# EAGLE board Francesco (EAGLE 6.4)
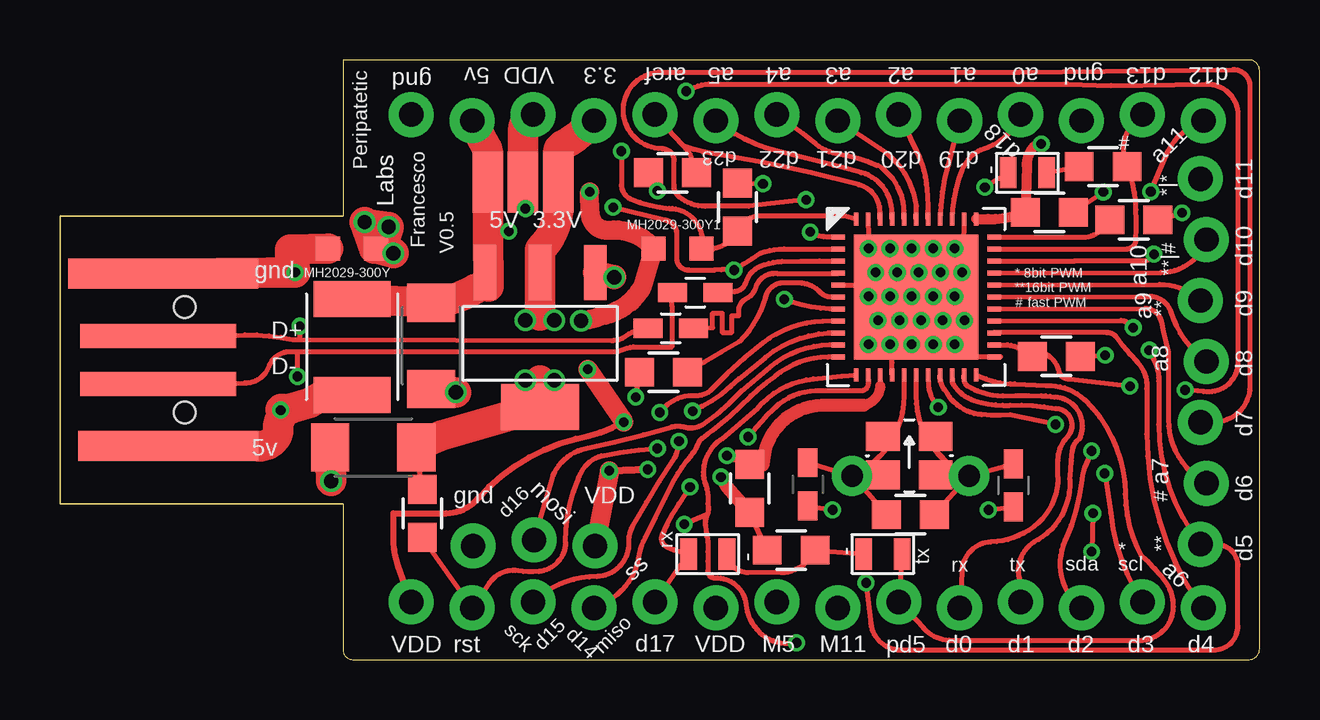
[diagram p0: board, top side]
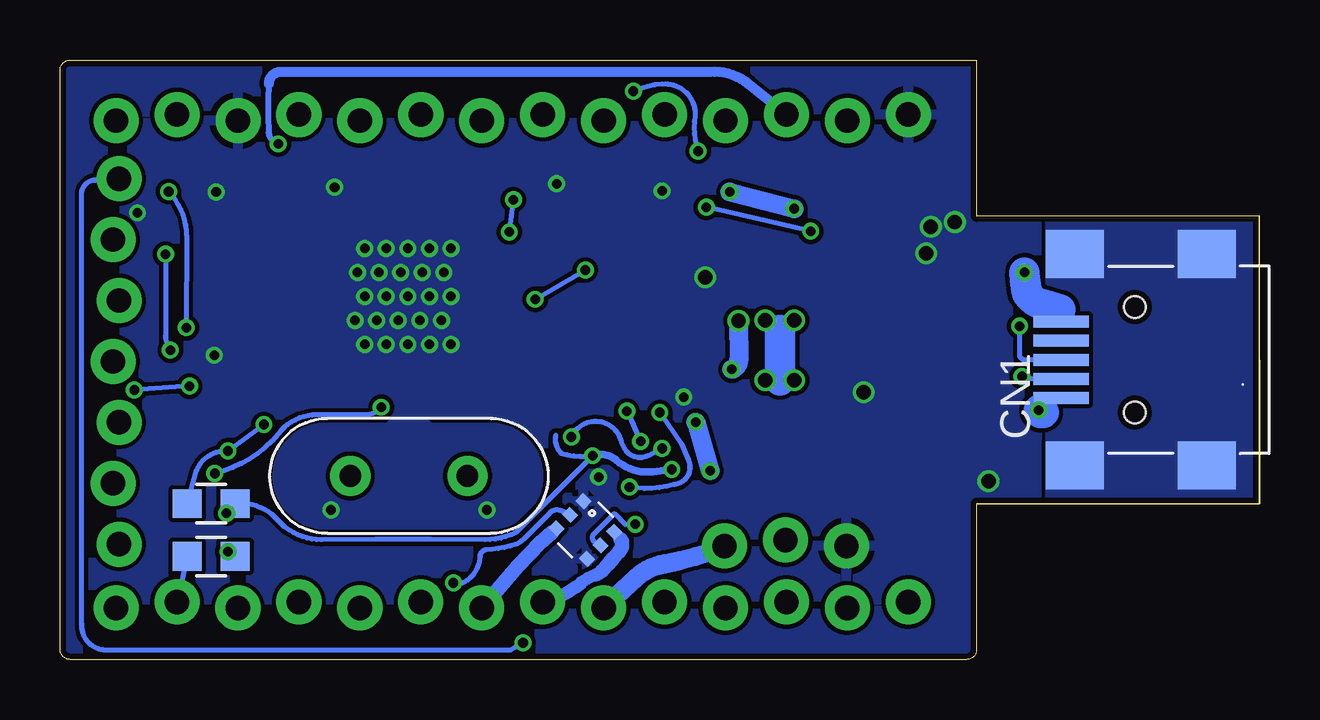
[diagram p1: board, bottom side, seen from below]

Size 50 x 25 mm. Coordinates in mm from the lower left corner, seen from the top.
Outline: 0,6.5 11.8,6.5 11.8,0.4 arc90 12.2,0 49.58,0 arc90 50,0.42 50,24.58 arc90 49.58,25 11.8,25 11.8,24.7 11.8,18.5 0,18.5 0,6.5
Copper layers (1*16): Top 0.035mm / dielectric 1.5mm / Bottom 0.035mm
Design rules "Fusion_eagle_rule_v1.1(mod)": minimum track width 7mil, minimum drill 12mil, track to track 7mil, track to pad 7mil, pad to pad 7mil, via to via 7mil, smd to smd 0mil, copper to edge 10mil, drill to drill 10mil, minimum pad ring 10mil, minimum via ring 6mil, stop-mask expansion 2mil, vias tented up to drill 100mil, thermal gap 10mil
bRestrict: 5 lines

## Footprints (pad centres in the part's own frame; a part is rotated, then mirrored left to right if it is on the bottom)
0603-CAP = smd 1.2 x 0.8: 1 -0.9,0; 2 0.9,0
0805 = smd 1.2 x 1.2: 1 -1,0; 2 1,0
1210 = smd 1.6 x 2: 1 -1.8,0; 2 1.8,0
USB-MINIB = smd 0.5 x 2.308: D+ 0,4.064; D- -0.8,4.064; GND 1.6,4.064; ID 0.8,4.064; VBUS -1.6,4.064 | smd 2 x 2.4: GND1 -4.4,-2; GND2 -4.4,3.5; GND3 4.4,3.5; GND4 4.4,-2 | hole 0.9: -2.2,1; 2.2,1
1X03_LOCK = drill 1.016 pad 1.88: 1 0,0.127; 2 2.54,-0.127; 3 5.08,0.127
1X07_LOCK = drill 1.016 pad 1.88: 1 0,0.127; 2 2.54,-0.127; 3 5.08,0.127; 4 7.62,-0.127; 5 10.16,0.127; 6 12.7,-0.127; 7 15.24,0.127
2029 = smd 1 x 1: P$1 -1,0; P$2 1,0
MF-MSMF = smd 1.5 x 3.2: P$1 -2,0; P$2 2,0
0603-RES = smd 1.2 x 0.8: 1 -0.95,0; 2 0.95,0
QFN-44 = smd 0.55 x 0.2: 1 -3.25,2.5; 2 -3.25,2; 3 -3.25,1.5; 4 -3.25,1; 5 -3.25,0.5; 6 -3.25,0; 7 -3.25,-0.5; 8 -3.25,-1; 9 -3.25,-1.5; 10 -3.25,-2; 11 -3.25,-2.5; 23 3.25,-2.5; 24 3.25,-2; 25 3.25,-1.5; 26 3.25,-1; 27 3.25,-0.5; 28 3.25,0; 29 3.25,0.5; 30 3.25,1; 31 3.25,1.5; 32 3.25,2; 33 3.25,2.5 | smd 0.2 x 0.55: 12 -2.5,-3.25; 13 -2,-3.25; 14 -1.5,-3.25; 15 -1,-3.25; 16 -0.5,-3.25; 17 0,-3.25; 18 0.5,-3.25; 19 1,-3.25; 20 1.5,-3.25; 21 2,-3.25; 22 2.5,-3.25; 34 2.5,3.25; 35 2,3.25; 36 1.5,3.25; 37 1,3.25; 38 0.5,3.25; 39 0,3.25; 40 -0.5,3.25; 41 -1,3.25; 42 -1.5,3.25; 43 -2,3.25; 44 -2.5,3.25 | smd 5.2 x 5.2: PAD 0,0
HC49US = drill 0.9 pad 1.676: 1 -2.44,0; 2 2.44,0
USB_PCB = smd 7.5 x 1.25: 5V -4.5,3.6 | smd 6.5 x 1: D+ -4.1,-1; D- -4.1,1 | smd 7.9 x 1.25: GND -4.3,-3.6
ZLDO1117 = smd 0.95 x 2.3: 1 -2.3,-3; 2 0,-3; 3 2.3,-3 | smd 3.25 x 1.9: 4 0,2.6
1X14_LOCK = drill 1.016 pad 1.88: 1 0,0.127; 2 2.54,-0.127; 3 5.08,0.127; 4 7.62,-0.127; 5 10.16,0.127; 6 12.7,-0.127; 7 15.24,0.127; 8 17.78,-0.127; 9 20.32,0.127; 10 22.86,-0.127; 11 25.4,0.127; 12 27.94,-0.127; 13 30.48,0.127; 14 33.02,-0.127
BRIDGE-3 = smd 1.27 x 2.54: 1 -1.47,0; 2 0,0; 3 1.47,0
XTAL3.2X2.5 = smd 1.4 x 1.2: 1 -1.1,-0.8; 2 1.1,-0.8; 3 1.1,0.8; 4 -1.1,0.8
0805-LED = smd 1.3 x 0.7: + 0,0.8; - 0,-0.8
SOT-363 = smd 0.5 x 0.45: 1 -0.9,0.8; 2 -0.9,0; 3 -0.9,-0.8; 4 0.9,-0.8; 5 0.9,0; 6 0.9,0.8

## Placement (x,y rotation side)
C1  18pF  [0603-CAP]  31.17,7.31 270 top
C2  18pF  [0603-CAP]  39.74,7.26 270 top
C3  0.1uF  [0805]  28.75,7.14 270 top
C5  1uF  [0805]  25.15,11.98 180 top
C6  10uF  [1210]  15.47,13.08 270 top
C7  10uF  [1210]  13.06,8.84 180 top
C9  0.1uF  [0805]  41.24,18.65 180 top
C10  0.1uF  [0805]  25.53,20.3 0 top
C11  0.1uF  [0805]  28.24,18.86 90 top
C12  0.1uF  [0805]  41.53,12.64 180 top
CN1  [USB-MINIB]  4.2,12.5 90 bottom
JP1  [1X03_LOCK]  22.3,4.86 180 top
JP4  [1X07_LOCK]  47.66,20.05 270 bottom
MH2029-300Y  FERRITE-2029  [2029]  12.17,17.14 180 top
MH2029-300Y1  FERRITE-2029  [2029]  25.74,17.14 180 top
PTH-FUSE  FUSE-PTH_MF-MSMF050  [MF-MSMF]  12.18,13.04 270 top
R1  1M  [0805]  35.45,6.04 0 top
R2  22  [0603-RES]  26.48,15.3 0 top
R3  22  [0603-RES]  25.46,13.81 0 top
R4  10k  [0805]  44.76,18.33 0 top
R5  1k  [0805]  43.48,20.55 180 top
R6  10k  [0805]  15.1,6.1 90 top
R7  1k  [0805]  30.48,4.56 180 top
R8  3.3k  [0805]  43.7,6.5 180 bottom
R9  3.3k  [0805]  43.7,4.3 0 bottom
U$1  ATMEGA32U4  [QFN-44]  35.68,15.12 0 top
U$2  HC49US  [HC49US]  35.45,7.66 180 bottom
U$3  USB-PCB  [USB_PCB]  0,12.5 180 top
U$4  5V-LDO-ZLDO1117  [ZLDO1117]  20.01,13.13 180 top
U$5  M14  [1X14_LOCK]  14.64,2.28 0 top
U$6  M14  [1X14_LOCK]  47.66,22.6 180 top
U$7  BRIDGE-3  [BRIDGE-3]  19.3,19.9 180 top
U$8  CRYSTAL-3.2X2.5  [XTAL3.2X2.5]  35.4,8.5 0 top
U$9  LED0805  [0805-LED]  40.32,20.3 270 top
U$10  LED0805  [0805-LED]  34.3,4.4 270 top
U$11  LED0805  [0805-LED]  27,4.4 90 top
U$12  N-DUAL-MOSFET  [SOT-363]  28.1,5.4 315 bottom

## Library data of the parts
C1-C3 C5-C7 C9-C12 JP1 JP4 MH2029-300Y MH2029-300Y1 PTH-FUSE R1-R9 U$1-U$12 = 1dah
CN1 = adafruit

## Nets
3V3: C7.1 R6.2 U$4.2 U$4.4 U$6.11 U$7.1
A0: U$1.36 U$6.4
A1: U$1.37 U$6.5
A2: U$1.38 U$6.6
A3: U$1.39 U$6.7
A4: U$1.40 U$6.8
A5: U$1.41 U$6.9
AREF: C10.2 U$1.42 U$6.10
AVDD: C11.1 C12.2 MH2029-300Y1.P$1 U$1.24 U$1.44
D0: U$1.20 U$5.10
D1: U$1.21 U$5.11
D2: R8.2 U$1.19 U$5.12
D3: R9.1 U$1.18 U$5.13
D4: U$1.25 U$5.14
D5: JP4.7 U$1.31 U$12.2
D6: JP4.6 U$1.27
D7: JP4.5 U$1.1
D8: JP4.4 U$1.28
D9: JP4.3 U$1.29
D10: JP4.2 U$1.30
D11: JP4.1 U$1.12 U$12.5
D12: U$1.26 U$6.1
D13: R5.1 U$1.32 U$6.2
D+: R3.2 U$1.4
D+IN: CN1.D+ R3.1 U$3.D+
D-: R2.2 U$1.3
D-IN: CN1.D- R2.1 U$3.D-
GND: C1.2 C2.2 C3.2 C5.2 C6.2 C7.2 C9.1 C10.1 C11.2 C12.1 JP1.3 MH2029-300Y.P$1 R4.2 R7.2 U$1.5 U$1.15 U$1.23 U$1.35 U$1.43 U$1.PAD U$4.1 U$6.3 U$6.14 U$9.- U$12.1 U$12.4
HWB: R4.1 U$1.33
M5: U$5.7 U$12.6
M11: U$5.8 U$12.3
MISO: U$1.11 U$5.4
MOSI: JP1.2 U$1.10
N$1: C1.1 R1.1 U$1.16 U$2.1 U$8.1
N$2: C2.1 R1.2 U$1.17 U$2.2 U$8.3
N$3: R7.1 U$10.- U$11.-
N$4: R5.2 U$9.+
RESET: R6.1 U$1.13 U$5.2
RXLED: U$1.8 U$5.5 U$11.+
SCK: U$1.9 U$5.3
TXLED: U$1.22 U$5.9 U$10.+
UCAP: C5.1 U$1.6
USB5V: C6.1 PTH-FUSE.P$1 U$1.2 U$1.7 U$4.3 U$6.13 U$7.3
USBGND: CN1.GND MH2029-300Y.P$2 U$3.GND
USBSHROUD: CN1.GND1 CN1.GND2 CN1.GND3 CN1.GND4
USBVIN: CN1.VBUS PTH-FUSE.P$2 U$3.5V
VDD: C3.1 C9.2 JP1.1 MH2029-300Y1.P$2 R8.1 R9.2 U$1.14 U$1.34 U$5.1 U$5.6 U$6.12 U$7.2

## Tracks (layer width: path | path; a pad name or v marks a point on that pad's centre or on a via)
3V3  (via drill 0.6)
  Top 0.2: R6.2 C7.1
  Top 0.813: v19.4,14.14 20,14.34 v20.6,14.14 | v19.4,11.64 20,11.64 v20.6,11.64
  Top 1.27: 20,11.64 20,11.03 U$4.4 15.9,9.34 arc9 C7.1 | 20,14.34 20,15.73 U$4.2 20,17.09 arc46 20.77,18.91 U$7.1 20.77,21.14 arc-63 20.96,21.45 arc22 U$6.11
  Bottom 0.813: v19.4,11.64 20,11.64 v20.6,11.64 | v19.4,14.14 20,13.74 v20.6,14.14
  Bottom 1.27: 20,13.74 20,11.64
A0
  Top 0.2: U$6.4 arc-53 38.5,21.3 arc49 37.6,20.4 arc22 U$1.36
A1
  Top 0.2: U$6.5 37,20.6 arc14 U$1.37
A2
  Top 0.2: 36.18,18.73 U$1.38 arc8 36.11,19.82 arc19 35.7,21.2 U$6.6
A3
  Top 0.2: U$1.39 35.69,18.87 arc50 34.2,21.3 U$6.7
A4
  Top 0.2: U$6.8 arc-5 31.5,21.5 arc30 32.4,21.1 arc-15 34.1,20.6 arc-58 35.18,18.7 U$1.40
A5
  Top 0.2: U$1.41 34.68,18.65 arc74 33.4,20.3 arc2 29.9,21.2 arc-26 U$6.9
AREF
  Top 0.2: C10.2 26.4,20.64 arc40 26,21.4 | 26,21.4 arc-1 U$6.10 | U$1.42 34.18,18.67 arc74 33.3,19.8 arc6 27.2,21.1 arc-10 26,21.4
AVDD  (via drill 0.4)
  Top 0.2: U$1.44 32.7,18.5 29.13,18.49 arc63 C11.1 arc-73 MH2029-300Y1.P$1 arc103 25.4,18.81 arc-18 23.8,19.2 arc-67 23.4,19.8 v23.4,21.2 | C12.2 arc37 39.5,13.12 U$1.24 39.48,13.12 40.6,12.9 arc-74 41.64,12 arc80 42.1,11.7 v44.6,11.4 | v46.9,11.24 arc-7 47.67,11.17 arc99 49.1,12.4 49.1,22.7 arc90 47.8,24 43.81,23.93 42,24 27.2,24 arc28 26.3,23.8 v26.1,23.7
  Bottom 0.2: v23.4,21.2 arc28 23.53,22.68 arc-98 24.9,24 arc-17 v26.1,23.7 | v44.6,11.4 v46.9,11.24
D0
  Top 0.2: U$1.20 37.19,11.64 arc42 37.24,11.47 arc40 38.1,10.8 arc21 39.6,10.6 arc-14 41.49,10.46 arc-135 42,9.3 arc44 41.6,8.3 41.6,7.6 arc-57 40.4,5.4 arc-31 38.8,4.9 arc86 37.6,3.7 arc-3 U$5.10
D1
  Top 0.2: U$1.21 arc0 37.68,11.7 arc63 37.86,11.39 arc6 38.26,11.2 arc23 39.3,11 arc-2 40.9,11 arc-11 41.46,10.94 arc-108 42.54,9.29 arc-30 42.46,9.18 arc45 42.2,8.7 arc2 42.1,7.5 arc-46 41.3,5.4 arc-14 40.6,4.9 arc93 40.2,2.9 arc-25 U$5.11
D2  (via drill 0.4)
  Top 0.2: v41.5,9.8 39.6,10.2 arc-9 38.42,10.21 arc-55 36.99,11.08 arc5 36.83,11.31 arc-38 U$1.19 36.69,11.58 | v43,8.7 42.7,8 arc9 42.6,7.5 arc-18 41.9,5 arc76 U$5.12
  Bottom 0.2: v41.5,9.8 v43,8.7 arc-71 44.3,7.9 R8.2
D3  (via drill 0.4)
  Top 0.2: U$1.18 36.2,11.4 arc34 v36.61,10.52 | v43.55,7.76 43.8,6.1 arc28 U$5.13
  Bottom 0.2: v36.61,10.52 arc56 37.4,10.2 39.3,10.2 arc-53 40.9,9.4 arc37 v43.55,7.76 | R9.1 U$5.13
D4
  Top 0.2: U$1.25 43.62,13.63 arc-60 44.03,13.44 arc9 44.9,12.4 arc-49 45.3,11.3 45.3,9.4 arc25 46.5,4 arc14 U$5.14
D5  (via drill 0.4)
  Top 0.2: U$1.31 42.3,16.62 45.12,16.62 arc61 v45.6,16.9 | v45.4,12.9 45.6,12.5 arc-28 45.8,11.6 45.8,9.8 arc38 JP4.7 arc2 48.2,4.8 arc-90 49.1,3.9 49.1,1.4 arc-90 48.1,0.4 35,0.4 arc-82 33.8,1.5 v33.6,3.2
  Bottom 0.2: v45.6,16.9 45.6,13.5 arc-37 v45.4,12.9 | U$12.2 29.1,6.2 arc-77 29.6,6.1 30.7,5 arc25 31,4.81 arc18 32.22,4.58 arc-87 32.5,4.3 arc62 33.2,3.2 arc53 v33.6,3.2
D6
  Top 0.2: U$1.27 45.23,14.64 arc-78 45.9,14.1 arc2 46.2,12.8 46.2,10 arc62 JP4.6
D7  (via drill 0.4)
  Top 0.2: JP4.5 arc-2 48.1,9.9 arc90 49.6,11.4 49.6,23.9 arc90 48.9,24.6 40,24.5 25.1,24.5 arc122 23.7,22.1 arc59 25.1,21.3 arc-90 25.6,20.8 25.6,19.8 arc56 25.8,19.3 arc40 26.9,18.9 28.7,18.9 v31.1,19.17 | U$1.1 31.94,17.62 arc-31 v31.27,17.83
  Bottom 0.2: v31.27,17.83 v31.1,19.17
D8
  Top 0.2: U$1.28 45.43,15.14 arc-73 46.3,14.5 arc37 JP4.4
D9
  Top 0.2: U$1.29 45.83,15.64 arc-43 JP4.3
D10
  Top 0.2: U$1.30 45.9,16.14 arc72 JP4.2
D11  (via drill 0.4)
  Top 0.2: U$1.12 arc0 31.4,11.7 arc44 29.1,10.5 27.6,9.2 arc31 27.1,8.7 arc50 26.87,7.4 arc-29 27.01,6.49 arc-21 27,6.1 | 27,6.1 arc35 26.9,5.6 arc4 27,4.9 arc-1 27,3.7 arc91 27.3,3.4 arc-86 28.6,2.3 arc97 v30.7,0.7 | 27,6.1 26.94,6.04 v26.02,5.64
  Bottom 0.2: JP4.1 arc8 48.5,20 arc-91 49.1,19.41 49.1,1.51 arc-94 48.1,0.4 31.2,0.4 arc7 v30.7,0.7 | U$12.5 27.7,4.9 arc110 27.73,5.25 26.89,6.09 26.43,5.62 v26.02,5.64
D12  (via drill 0.4)
  Top 0.2: U$1.26 44.23,14.14 arc-54 v44.73,13.84 | v45.47,19.51 46.1,21 arc-48 U$6.1
  Bottom 0.2: v44.73,13.84 44.71,17.67 arc-43 v45.47,19.51
D13
  Top 0.2: U$1.32 44.47,17.12 arc89 44.85,17.54 arc1 44.85,18.74 arc23 R5.1 arc-79 U$6.2
D+
  Top 0.2: R3.2 27.2,13.84 27.2,14.44 27.6,14.44 27.6,13.64 28,13.64 28,14.34 28.3,14.34 28.3,14.64 arc-53 28.6,15.04 arc45 29,15.5 arc-81 29.9,16.1 32.44,16.1 U$1.4
D+IN  (via drill 0.4)
  Top 0.2: U$3.D+ 7.7,13.54 arc-13 9.7,13.34 10,13.34 | 10,13.34 23,13.3 arc36 23.6,13.5 arc-31 R3.1 | v10,13.9 10,13.34
  Bottom 0.2: CN1.D+ 9.8,12.5 arc90 10,12.7 v10,13.9
D-
  Top 0.2: R2.2 28.1,15.34 arc70 28.6,15.74 arc-52 29.2,16.4 arc-20 30.1,16.6 arc-1 U$1.3
D-IN  (via drill 0.4)
  Top 0.2: U$3.D- 7.7,11.54 arc73 8.7,12.2 arc-75 9.7,12.84 9.9,12.84 | 9.9,12.84 23.1,12.84 arc23 23.4,12.9 arc-14 23.9,13.04 25.5,13.04 25.5,14.74 R2.1 | v9.9,11.8 9.9,12.84
  Bottom 0.2: CN1.D- 9.5,11.7 v9.9,11.8
GND  (via drill 0.4, 0.6)
  Top 0.2: v24,10.94 C5.2 | R4.2 v46.77,18.62 | U$1.43 33.7,17.64 arc74 U$1.PAD | U$1.5 33.29,15.62 arc-24 U$1.PAD | U$1.35 37.68,17.91 arc-70 U$1.PAD | U$1.PAD arc91 38.14,12.62 U$1.23 arc1 39.2,12.62 | U$1.15 34.68,12.38 arc-41 U$1.PAD | C11.2 v29.3,19.84 | C10.1 v24.9,19.54 | C12.1 v43.57,12.69 | U$1.PAD v34.9,16.14 | C9.1 v43.49,19.49 | v38.7,6.24 C2.2 | C1.2 v32.2,6.24 | U$9.- v38.55,19.69 | R7.2 C3.2
  Top 0.55: C3.2 27.8,7.2 v27.55,7.61
  Top 1.016: U$4.1 v23.1,15.94
  Top 1.27: MH2029-300Y.P$1 v13.9,16.94 13.4,17.14 v13.7,18.04 12.9,18.14 v12.7,18.24 13.1,17.14 | v16.5,11.14 15.57,11.14 C6.2 | C7.2 v11.3,7.44
  other vias: 33.7,17.14 37.3,13.14 34.6,17.14 35.5,17.14 36.4,17.14 37.3,17.14 34,16.14 35.8,16.14 36.7,16.14 37.6,16.14 33.7,15.14 34.6,15.14 35.5,15.14 36.4,15.14 37.3,15.14 36.4,13.14 35.5,13.14 34.6,13.14 33.7,13.14 34.1,14.14 35,14.14 35.9,14.14 36.8,14.14 37.7,14.14
  pour Bottom: -6.35,-5.08 101.6,-5.08 101.6,64.77 -6.35,64.77
HWB
  Top 0.2: U$1.33 42.75,17.61 arc55 R4.1
M5
  Bottom 0.2: U$12.6 26.63,5.02
  Bottom 0.5: 27.68,3.52 arc-23 28.27,3.2
  Bottom 0.55: 27.4,3.7 arc31 27.68,3.52 | 28.27,3.2 arc27 U$5.7
  Bottom 0.6: 26.63,5.02 arc82 26.7,4.5 arc1 27.4,3.7
M11
  Bottom 0.2: U$12.3 29.5,5.3
  Bottom 0.6: 29.5,5.3 arc-8 30.9,3.9 arc0 U$5.8
MISO
  Top 0.2: U$1.11 32.01,12.61 arc40 29.8,11.8 arc10 28.8,11 arc-9 27.45,9.76 arc0 26.76,9.22 arc32 26.6,9 arc-22 26.3,8.5 arc13 25.6,7.5 arc-1 24.4,5.1 arc19 24.1,4.2 arc-31 23.6,3.1 arc-29 U$5.4
MOSI
  Top 0.2: 32.09,13.12 U$1.10 arc44 29.6,12.2 28.4,11.2 arc-12 26.8,9.8 arc-47 26,9.7 arc32 25.5,9.7 arc-5 21.91,8.8 arc62 20.5,7.5 JP1.2
N$1
  Top 0.2: U$1.16 35.18,11 arc-65 U$2.1 | C1.1 U$2.1 | U$2.1 33.42,7.23 | 33.42,7.23 R1.1 | U$8.1 33.42,7.23
N$2
  Top 0.2: U$1.17 35.68,11 arc68 U$2.2 | U$2.2 C2.1 | R1.2 U$2.2 | U$8.3 36.5,8.7 37.1,8.1 U$2.2
N$3
  Top 0.2: U$10.- R7.1 arc-63 30.07,3.63 28.69,3.62 arc-82 U$11.-
N$4
  Top 0.2: U$9.+ R5.2
RESET  (via drill 0.4)
  Top 0.2: U$1.13 33.69,11.52 arc-86 33.4,11.2 31.5,11.2 arc41 29.8,10.5 arc8 v28.68,9.28 | R6.1 U$5.2 arc-2 17.9,3.2 arc-64 19.1,3.7 arc14 19.95,3.67 arc85 21.07,4.9 arc-24 21.6,7.5 arc-58 22.57,8.5 arc-7 v24.9,8.8
  Bottom 0.2: v24.9,8.8 25.5,8.5 arc78 26.4,8.7 arc24 26.6,9.1 arc-141 v28.68,9.28
RXLED  (via drill 0.4)
  Top 0.2: U$1.8 31.8,14.1 arc36 29.3,13.2 arc8 27.1,11.2 arc-31 26.6,11 arc-9 26.2,11 arc47 v25,10.3 | U$5.5 U$11.+ arc-10 25.3,4.7 arc-89 25.1,5.2 arc-11 25.8,6.5 v26.26,7.19
  Bottom 0.2: v25,10.3 24.1,9 23.8,8.3 arc108 24.4,7.3 arc25 v26.26,7.19
SCK  (via drill 0.4)
  Top 0.2: 32.07,13.62 U$1.9 arc41 29.4,12.6 28.3,11.7 arc-21 v26.37,10.36 | v25.8,9.1 arc-24 25.8,9 arc-23 25.53,8.28 arc4 23.93,5.68 arc33 23.7,4.9 arc-90 22.38,3.46 arc44 U$5.3
  Bottom 0.2: v26.37,10.36 v25.8,9.1
TXLED
  Top 0.2: U$1.22 38.6,11.7 arc25 39.8,11.5 41.11,11.42 arc-46 42.69,10.84 arc-46 44.4,6.9 arc30 45.1,4.3 arc-16 46.11,3.2 arc-41 46.4,2.06 arc-84 45,0.8 37.2,0.8 arc-48 36,1.3 U$5.9 U$10.+
UCAP
  Top 0.2: U$1.6 32.11,15.12 arc-47 31.7,15.3 arc50 30.7,15.7 30.1,15.7 arc74 29.4,15.1 arc-30 28.3,13.24 arc1 C5.1
USB5V  (via drill 0.4)
  Top 0.2: 17.3,15.44 arc17 U$4.3 | U$4.3 17.7,16.84 arc-91 v18.71,17.86 | v23.06,18.86 25.2,18.34 arc-90 25.7,17.64 25.7,16.74 arc90 26.2,16.24 27.3,16.24 arc-8 v28.1,16.24 arc2 29.2,16.94 arc-20 30.18,17.12 32.41,17.12 U$1.2 | U$1.7 32.09,14.62 arc-19 v30.19,15.02 | 17.87,15.55 U$4.3
  Top 1.27: PTH-FUSE.P$1 C6.1 | C6.1 arc28 17.3,15.44 | C6.1 15,14.94 | U$6.13 17.8,21.3 17.85,21.12 U$7.3 17.87,15.55
  Bottom 0.2: v18.71,17.86 v23.06,18.86 | v30.19,15.02 v28.1,16.24
USBGND  (via drill 0.4)
  Top 1.27: U$3.GND 8.7,16.14 v9.8,16.14 | v9.8,16.14 9.6,16.3 | 9.6,16.3 9.6,17.1 MH2029-300Y.P$2 | v9.8,16.14 arc152 9.6,16.3
  Bottom 0.2: CN1.GND 8.3,14.6
  Bottom 1.27: 8.3,14.6 9,14.8 arc53 9.7,15.3 arc10 v9.8,16.14
USBSHROUD
  pour Bottom (no thermals): -2.4,22 8.3,22 8.3,4 -2.4,4
USBVIN  (via drill 0.4)
  Top 0.2: 9.1,9.5 v9.2,10.4
  Top 1.27: U$3.5V 8.21,8.9 arc83 9.1,9.5 arc-82 9.7,10.5 10.4,10.7 10.9,11 PTH-FUSE.P$2 | v9.2,10.4 arc-185 9.3,10.4
  Bottom 0.2: CN1.VBUS 9,10.3
  Bottom 1.27: 9,10.3 arc132 v9.2,10.4
VDD  (via drill 0.4, 0.6)
  Top 0.2: U$1.14 34.19,11.41 | 29.3,8.1 arc-134 C3.1 arc-50 28.7,8.2 | v19.4,18.8 U$7.2 | v43.06,6.1 v43,4.5
  Top 0.254: U$5.1 14.1,3.9 arc-21 13.9,5.1 arc2 13.9,6.1 16.1,6.1 arc50 17.4,6.7 arc-34 21.5,9.2 arc18 v23.5,9.9
  Top 0.305: v27.8,8.5 28.7,8.2 | v24.5,7.93 v22.9,7.87
  Top 0.406: U$1.34 38.68,18.37 arc24 C9.2 40.3,20.6 arc-44 40.6,21.4 arc-28 v40.9,21.5 | 34.19,11.41 arc-76 33.5,10.6
  Top 0.55: 33.5,10.6 32,10.6 arc92 29.3,8.1
  Top 0.8: v21.72,14.12 arc19 22.52,14.32 arc52 24.25,15.51 MH2029-300Y1.P$2 arc58 22.9,17.9 arc-95 22.1,18.6 v22.08,19.5 | v22,12.1 v23.5,9.9 | v22.9,7.87 JP1.1
  Top 1.27: U$7.2 19.3,22 arc-60 U$6.12
  Bottom 0.2: 29.34,9.36 arc-59 29.1,8.6 arc-23 v27.8,8.5 31,5.3 arc27 32.3,5 arc-1 39.1,5 arc49 40.9,5.8 arc-54 R8.1 arc-94 v43.06,6.1 | v43,4.5 R9.2
  Bottom 0.254: 41.3,24 arc-6 41.3,22 arc-66 v40.9,21.5
  Bottom 0.305: v24.5,7.93 25.3,7.83 arc49 26.8,8.3 arc-61 v27.8,8.5
  Bottom 0.406: U$6.12 21.3,24 arc-43 22.9,24.5 40.8,24.5 arc-90 41.3,24
  Bottom 0.8: v22.08,19.5 v19.4,18.8 | v21.72,14.12 21.7,12.5 arc70 v22,12.1 | v23.5,9.9 v22.9,7.87 | U$5.6 26,3.4 arc33 24.8,4 arc-12 JP1.1

## Text on the board
tPlace: Peripatetic | 5v | VDD | 3.3 | aref | a5 | a4 | a3 | a2 | a1 | a0 | gnd | d13 | d12 | gnd | # | a11 | Francesco | d23 | d22 | d21 | d20 | d19 | d18 | Labs | V0.5 | *|* | d11 | 5V | 3.3V | gnd | a10 | **|# | d10 | * 8bit PWM / **16bit PWM / # fast PWM | a9 | ** | d9 | D+ | D- | a8 | d8 | d7 | 5v | gnd | d16 | VDD | # | a7 | d6 | mosi | rx | ss | tx | rx | tx | sda | * | scl | ** | d5 | a6 | d15 | sck | pd5 | VDD | rst | d14 | miso | d17 | VDD | M5 | M11 | d0 | d1 | d2 | d3 | d4